# Altium PCB 468524-L.PcbDoc (part 2 of 4)
Units mm, origin at the board's own origin, x right, y up, seen from the top; angles counter-clockwise.
Board outline 160 x 90 mm, 2 copper layers (Top Layer, Bottom Layer), stack 1.571 mm thick; 225 components, 131 nets, 717 pads, 560 vias.
Unrouted connection lines stored in the file: 2.
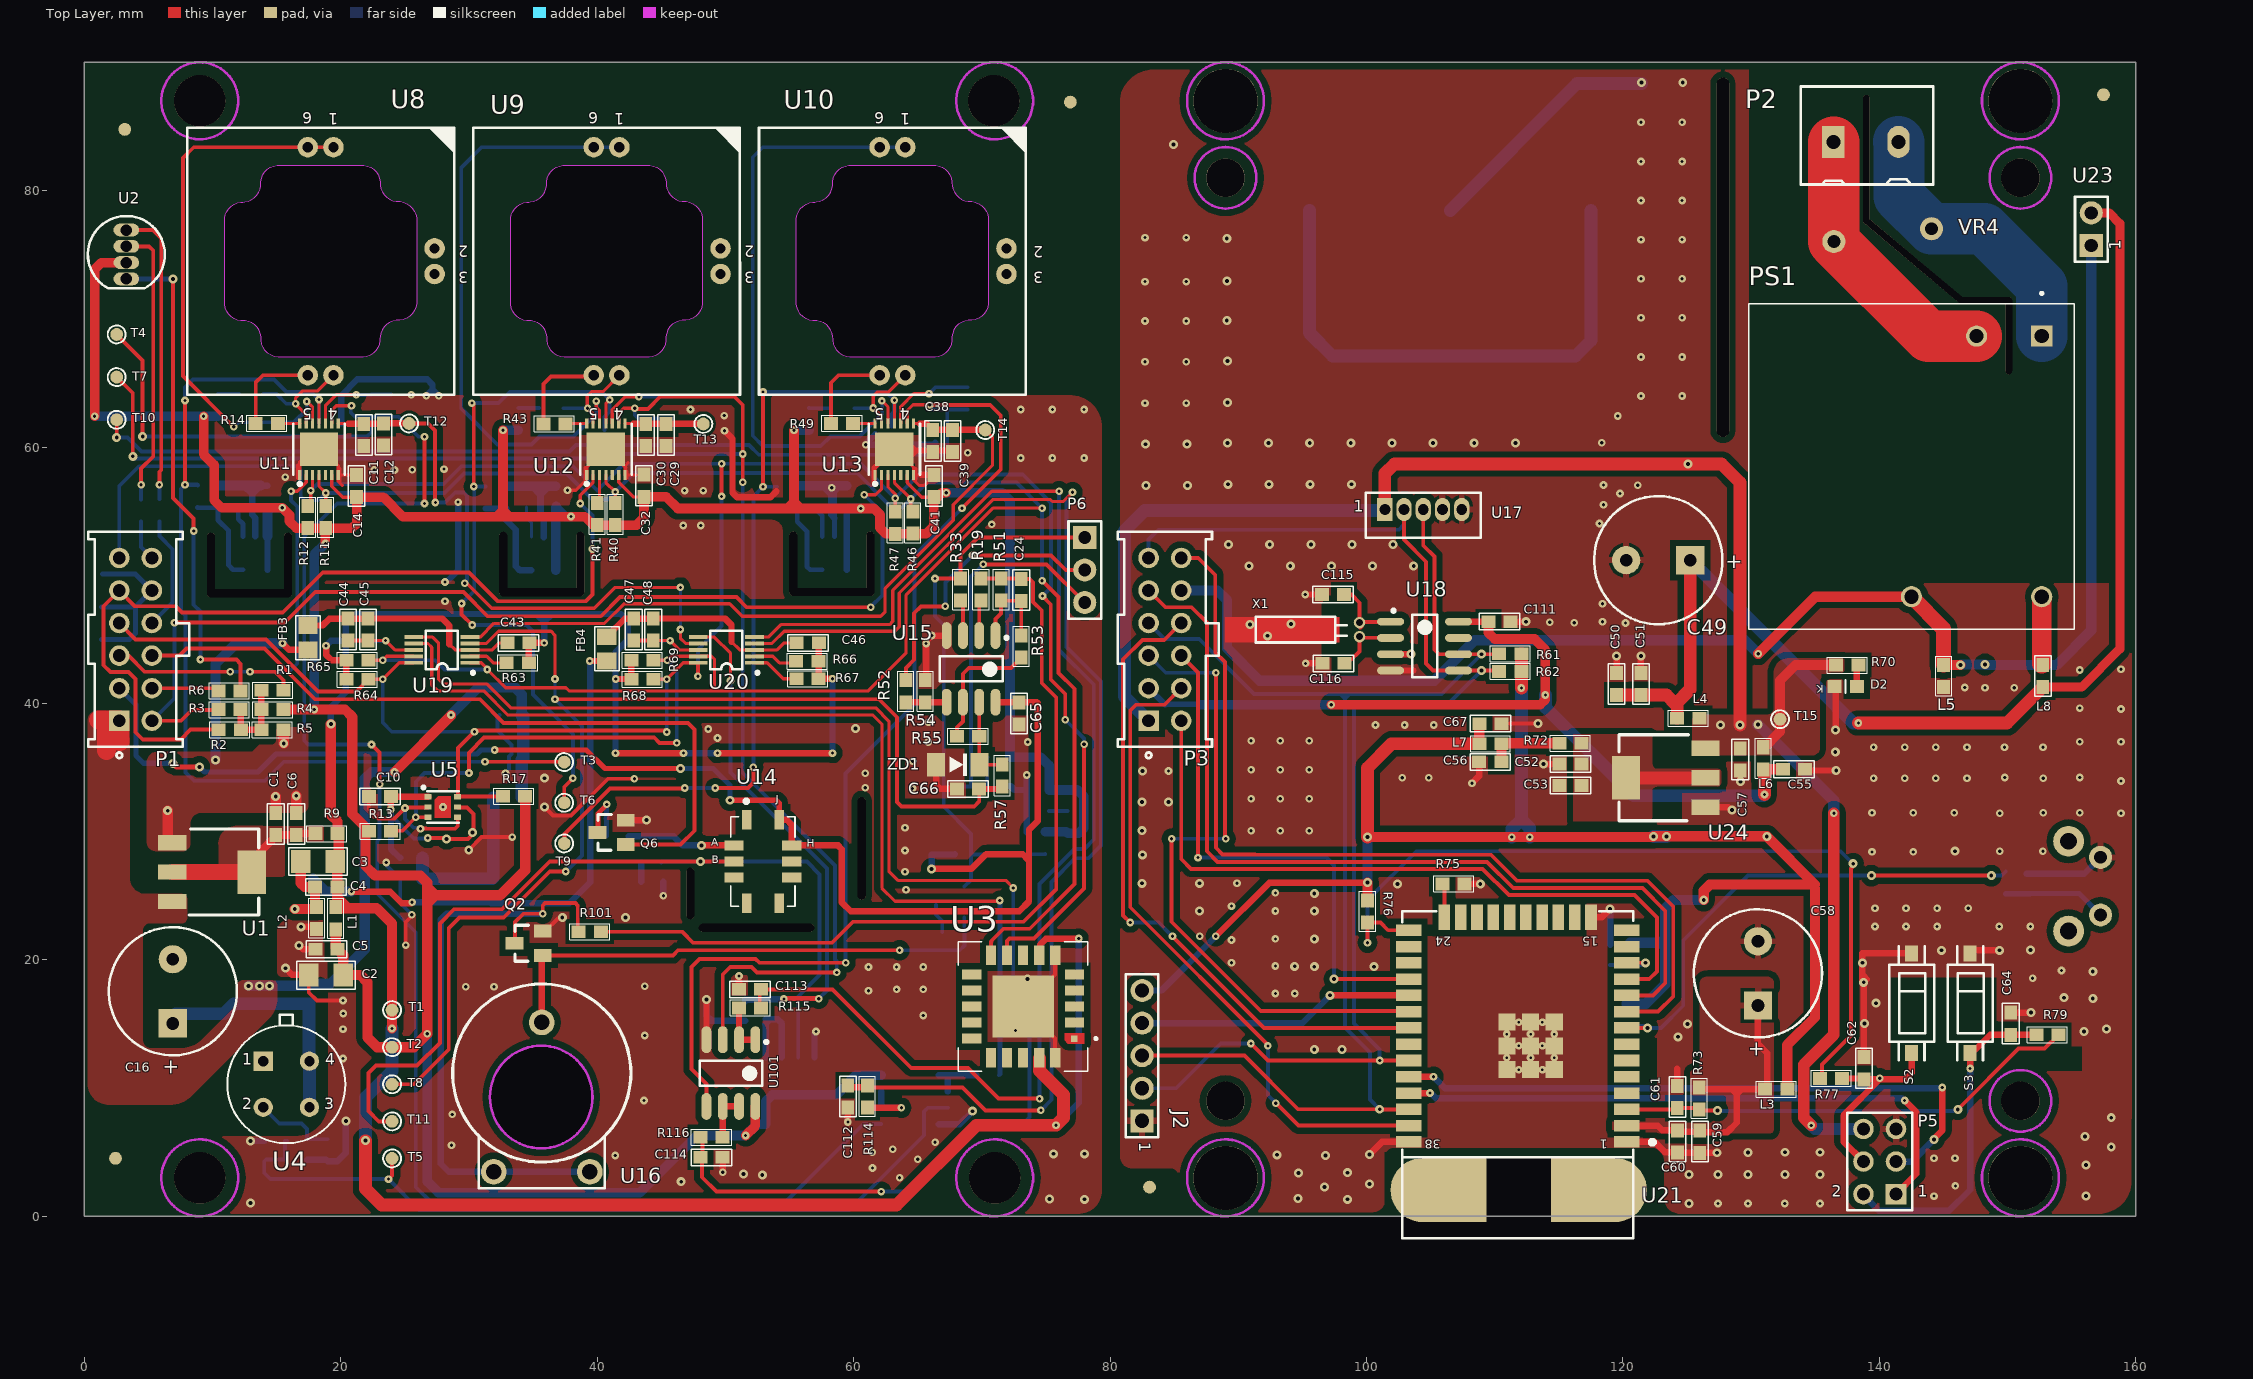
[diagram p0: Top Layer view]

## Via types (continued)
v2: diameter 0.7, hole 0.3, Top Layer to Bottom Layer, tented both sides, 179 vias
v3: diameter 0.6, hole 0.2, Top Layer to Bottom Layer, 12 vias
v4: diameter 0.6, hole 0.2, Top Layer to Bottom Layer, tented both sides, 3 vias
v5: diameter 0.6, hole 0.3, Top Layer to Bottom Layer, tented both sides, 1 vias

## Nets (pads, with @x,y where several pads share a name; then routed paths per layer and width w, separated by ;. In a path a pad name is that pad's centre, name@x,y a point inside that pad or via, vN(x,y) a via of type N, cw(c..) or ccw(c..) an arc to the next point about the centre after c; other vN are vias at no path point)
1V8: C10.2 R24.1 U5.1 U5.5 | length 18.4
  Top Layer w0.3: v1(26.776,29.501) 28.18,29.501 v2(28.25,29.431) 29.918,29.431 30.263,29.776 v2(30.263,29.924) ; U5.5@29.115,31.925 29.165,31.875 29.852,31.875 30.337,31.391 v2@30.337,29.85
  Top Layer w0.5: v1(23.898,31.735) 23.906,31.743 23.906,32.717 23.923,32.734 26.806,32.734 U5.1@26.815,32.725
  Bottom Layer w0.3: 23.914,31.254 25.693,29.475 26.75,29.475 v1(26.776,29.501)
  Bottom Layer w0.5: v1(23.898,31.735) 23.914,31.719 23.914,31.254 23.914,28.627 24.586,27.955 R24.1@24.636,27.955